# Altium PCB AmplificadorRF.PcbDoc
Units mm, origin at the board's own origin, x right, y up, seen from the top; angles counter-clockwise.
Board outline 199.01 x 104.14 mm, 2 copper layers (Top Layer, Bottom Layer); 57 components, 27 nets, 132 pads, 0 vias.
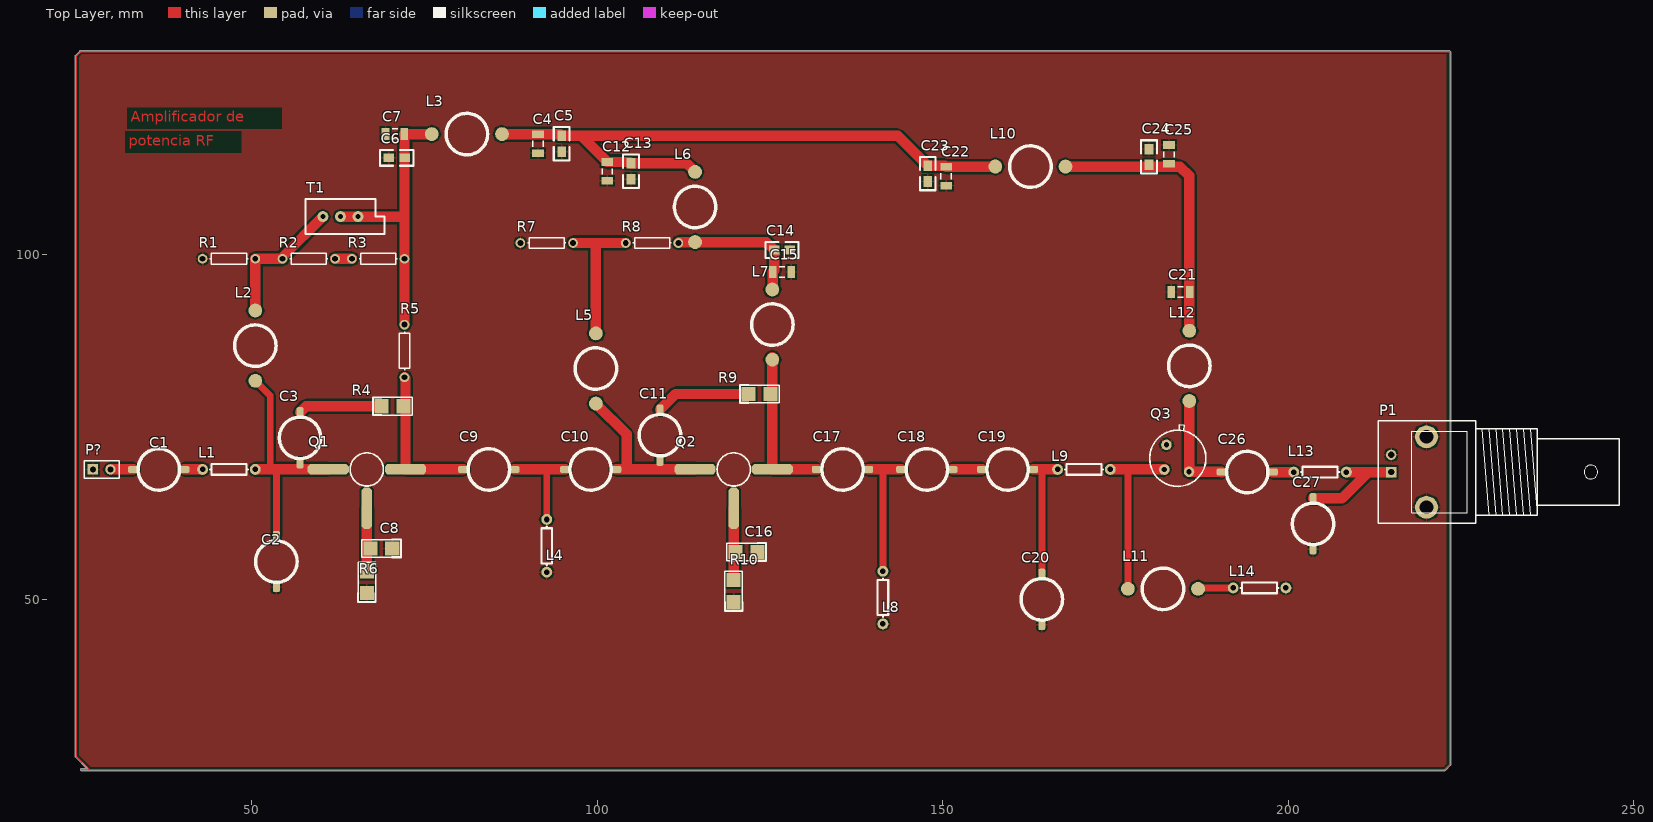
[diagram p0: Top Layer view]
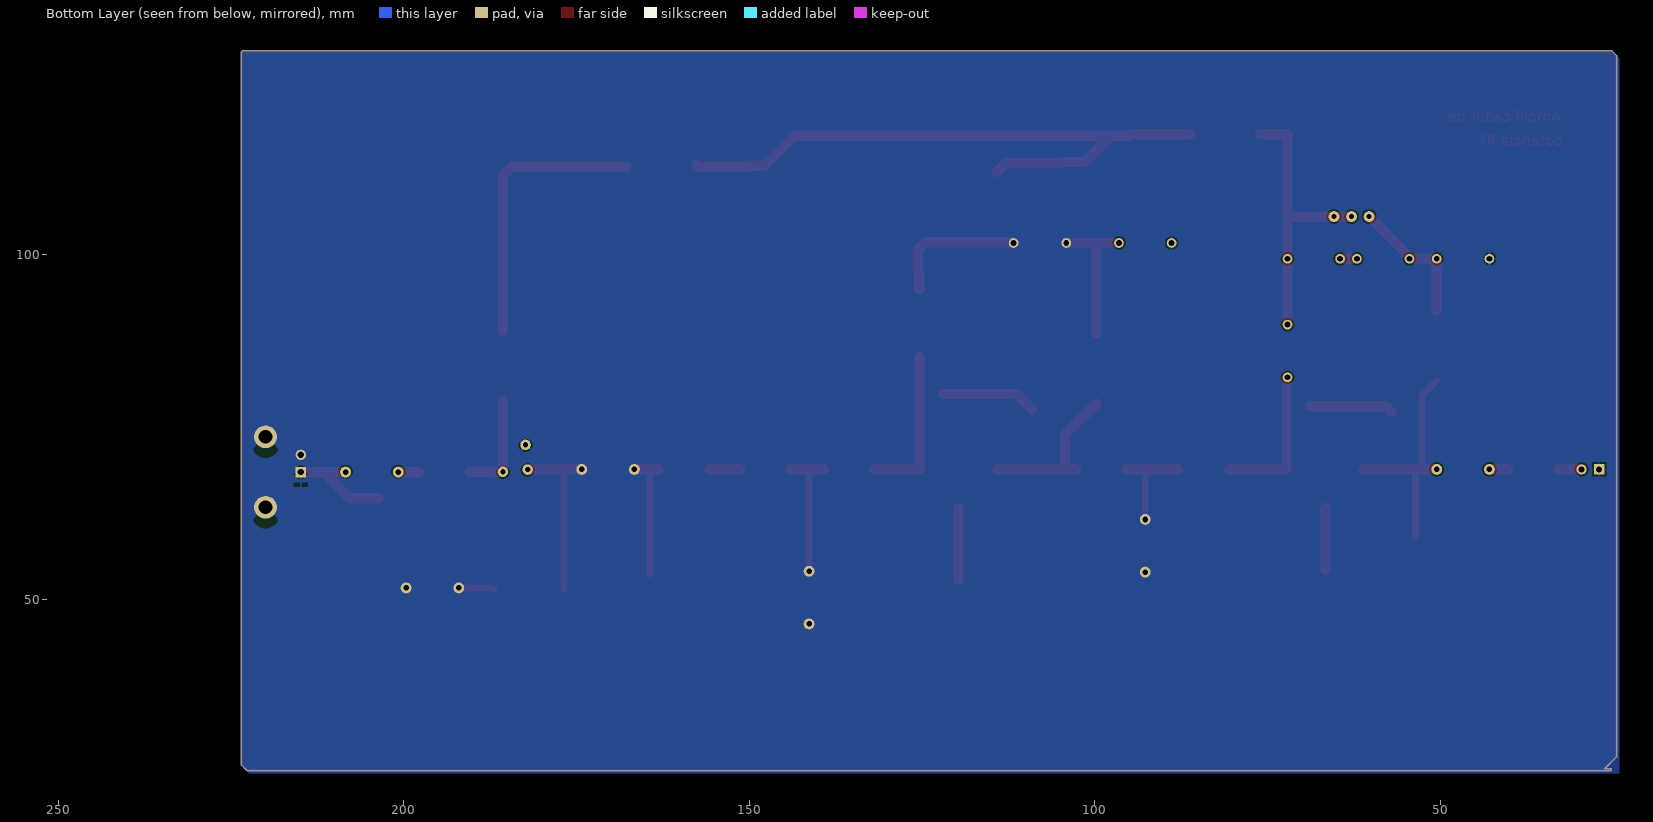
[diagram p1: Bottom Layer view, seen from below]

## Layer stack, top to bottom
Top Solder: solder mask 0.0102, Solder Resist, Dk 3.5
Top Layer: signal copper 0.0356
Dielectric 1: dielectric 0.32, FR-4, Dk 4.8
Bottom Layer: signal copper 0.0356
Bottom Solder: solder mask 0.0102, Solder Resist, Dk 3.5

## Board outline
24.548,27.214 cw(c24.638,27.305) 24.511,27.305 24.511,128.651 cw(c24.638,128.651) 24.548,128.742 24.548,128.741 25.183,129.376 25.182,129.376 cw(c25.273,129.286) 25.273,129.413 223.266,129.413 cw(c223.266,129.286) 223.357,129.376 223.356,129.376 223.483,129.249 223.483,129.25 cw(c223.393,129.159) 223.52,129.159 223.52,26.162 cw(c223.393,26.162) 223.483,26.071 223.483,26.072 222.721,25.31 222.722,25.31 cw(c222.631,25.4) 222.631,25.273 25.4,25.273 cw(c25.4,25.4) 25.4,25.527 26.235,25.527

## Design rules (kind name [scope] priority, off if disabled: settings)
Clearance [All] p1: gap=0.254
PolygonConnect [All] p1: connectstyle=Relief reliefconductorwidth=0.254 reliefentries=4 polygonreliefangle="90 Angle" airgapwidth=0.254
RoomDefinition AmplificadorRF [InComponentClass('AmplificadorRF')] p1: confinementstyle=ConfineIn formatcopy=TRUE lockcomponents=FALSE outline 243.967,37.973 302.133,37.973 302.133,60.198 243.967,60.198
RoutingVias [All] p1: holewidth=0.711 width=1.27 viastyle="Through Hole" minholewidth=0.711 minwidth=1.27 maxholewidth=0.711 maxwidth=1.27
SolderMaskExpansion [All] p1: expansion=0.102
Width [All] p1: maxlimit=2 minlimit=0.254 preferedwidth=0.254
30 further rules are at their usual default settings.

## Components (designator, comment, footprint, x,y, rotation, side; value= is the part's Value field where it differs from the comment)
C1 "Cap Var" Trimer 36.576,68.834 r270 top
C2 "Cap Var" Trimer 53.594,55.499 r0 top
C3 "Cap Var" Trimer 57.023,73.406 r0 top
C4 "Cap Semi" C1206#1 91.44,115.951 r270 top
C5 "Cap Semi" 0805 94.869,117.094 r270 top
C6 "Cap Semi" 0805 72.136,113.919 r180 top
C7 "Cap Semi" C1206#1 70.739,117.348 r180 top
C8 "Cap Semi" C1206#2 70.358,57.404 r180 top
C9 "Cap Var" Trimer 84.328,68.834 r90 top
C10 "Cap Var" Trimer 99.06,68.834 r90 top
C11 "Cap Var" Trimer 109.093,73.787 r0 top
C12 "Cap Semi" C1206#1 101.473,111.967 r270 top
C13 "Cap Semi" 0805 104.902,113.11 r270 top
C14 "Cap Semi" 0805 125.603,100.584 r0 top
C15 "Cap Semi" C1206#1 126.746,97.409 r0 top
C16 "Cap Semi" C1206#2 123.19,56.896 r180 top
C17 "Cap Var" Trimer 135.509,68.834 r90 top
C18 "Cap Var" Trimer 147.701,68.834 r90 top
C19 "Cap Var" Trimer 159.385,68.834 r90 top
C20 "Cap Var" Trimer 164.338,50.038 r180 top
C21 "Cap Semi" C1206#1 184.404,94.488 r0 top
C22 "Cap Semi" C1206#1 150.495,111.252 r270 top
C23 "Cap Semi" 0805 147.828,112.776 r270 top
C24 "Cap Semi" 0805 179.832,112.903 r90 top
C25 "Cap Semi" C1206#1 182.753,114.427 r90 top
C26 "Cap Var" Trimer 194.056,68.453 r90 top
C27 "Cap Var" Trimer 203.581,60.96 r180 top
L1 "Inductor" AXIAL0.3 42.926,68.834 r0 top
L2 "Inductor Iron" VK200 50.546,86.741 r180 top
L3 "Inductor Iron" VK200 81.153,117.348 r90 top
L4 "Inductor" AXIAL0.3 92.71,53.975 r90 top
L5 "Inductor Iron" VK200 99.822,83.439 r180 top
L6 "Inductor Iron" VK200 114.173,106.807 r180 top
L7 "Inductor Iron" VK200 125.349,89.789 r180 top
L8 "Inductor" AXIAL0.3 141.351,46.482 r90 top
L9 "Inductor" AXIAL0.3 166.624,68.834 r0 top
L10 "Inductor Iron" VK200 162.687,112.649 r270 top
L11 "Inductor Iron" VK200 181.864,51.562 r270 top
L12 "Inductor Iron" VK200 185.674,83.82 r180 top
L13 "Inductor" AXIAL0.3 200.787,68.453 r0 top
L14 "Inductor" AXIAL0.3 192.024,51.689 r0 top
P1 "BNC" "BNC_RA CON" 214.884,68.453 r180 top
P? "Header 2" HDR1X2 27.051,68.834 r0 top
Q1 "2N3904" TO50 66.675,68.834 r90 top
Q2 "2N3904" TO50 119.761,68.834 r90 top
Q3 "2N3904" TO-39 182.372,72.39 r130 top
R1 "Res1" AXIAL-0.3 46.736,99.314 r0 top
R2 "Res1" AXIAL-0.3 58.293,99.314 r0 top
R3 "Res1" AXIAL-0.3 68.326,99.314 r0 top
R4 "Res1" C1206#2 68.834,77.978 r0 top
R5 "Res1" AXIAL-0.3 72.136,85.979 r90 top
R6 "Res3" C1206#2 66.675,50.927 r90 top
R7 "Res1" AXIAL-0.3 92.71,101.6 r0 top
R8 "Res1" AXIAL-0.3 107.95,101.6 r0 top
R9 "Res1" C1206#2 121.92,79.756 r0 top
R10 "Res3" C1206#2 119.761,49.657 r90 top
T1 "Contraste" VR5 60.325,105.41 r0 top

## Footprints (in the part's own frame and the unit in brackets; to place one, negate y for a bottom-side part, rotate by r counter-clockwise, add the part's x,y. Pads: shape width x height; smd on the part's side, far side on the other; paste and mask are expansions set on the pad)
0805 [mil]
  rect 60x50 smd: 1(0,0) 2(90,0)
  silkscreen extent -50,-45 140,45
AXIAL0.3 [mil]
  round 62 hole 32: 1(0,0) 2(300,0)
  silkscreen extent 41,-30 259,30
AXIAL-0.3 [mm] "Axial Device, Thru-Hole; 2 Leads; 0.3 in Pin Spacing"
  round 1.4 hole 0.85: 1(-3.81,0) 2(3.81,0)
  silkscreen extent -2.77,-0.76 2.77,0.76
"BNC_RA CON" [mm] "Connector; BNC Elbow"
  rect 1.5x1.5 hole 0.9: 1(0,0)
  round 3.3 hole 2: 2(-5.1,5.1) 2(-5.1,-5.1)
  round 1.5 hole 0.9: 2(0,-2.5)
  silkscreen extent -33,-7.4 1.9,7.4
C1206#1 [mm] "Chip Capacitor, Body 3.2x1.6mm, IPC High Density"
  rect 1.1x1.7 smd: 1(-1.35,0) 2(1.35,0)
  silkscreen extent -0.4,-0.75 0.4,0.75, body extent -1.7,-0.9 1.7,0.9, height 1.3
C1206#2 [mm]
  rect 2.032x2.032 smd paste-1.041: 1(0,0) 2(3.175,0)
  oct 1.981x1.981 on Top Paste: z(0,0) z(3.175,0)
  silkscreen extent -1.27,-1.27 4.44,1.27
HDR1X2 [mm] "Connector; Header; 2 Position"
  rect 1.5x1.5 hole 0.9: 1(0,0)
  round 1.5 hole 0.9: 2(2.54,0)
  silkscreen extent -1.27,-1.27 3.81,1.27
TO50 [mm]
  oct 6x1.5 smd: 1(-5.588,0)
  oct 1.5x6 smd: 2(0,5.6) 3(0,-5.6)
  silkscreen extent -2.4,-2.4 2.4,2.4
TO-39 [mil]
  round 60 hole 30: 1(0,0) 2(-100,100) 3(-200,0)
  silkscreen extent -260,-160 60,160
Trimer [mm]
  rrect50% 1x1.5 smd: 1(0,-3.683) 2(0,3.683)
  silkscreen extent -3,-3 3,3
VK200 [mm]
  round 2 smd: 1(0,5.08) 2(0,-5.08)
  silkscreen extent -3,-3 3,3
VR5 [mil]
  round 62 hole 28: 1(0,0) 2(100,0) 3(200,0)
  silkscreen extent -100,-100 350,100

## Part data
C1 C2 C3 C9 C10 C11 C17 C18 C19 C20 C26 C27: "Variable or Adjustable Capacitor"
C4 C5 C6 C7 C8 C12 C13 C14 C15 C16 C21 C22 C23 C24 C25: "Capacitor (Semiconductor SIM Model)"
L2 L3 L5 L6 L7 L10 L11 L12: "Magnetic-Core Inductor"
P1: "BNC Elbow Connector"
P?: "Header, 2-Pin"
Q1 Q2 Q3: "NPN General Purpose Amplifier"
R1 R2 R3 R4 R5 R6 R7 R8 R9 R10: "Resistor"
T1: library part "RESISTOR TAPPED", "TRIMPOT AJUSTE VERT"

## Nets (pads, with @x,y where several pads share a name; then routed paths per layer and width w, separated by ;. In a path a pad name is that pad's centre, name@x,y a point inside that pad or via, vN(x,y) a via of type N, cw(c..) or ccw(c..) an arc to the next point about the centre after c; other vN are vias at no path point)
GND: C2.1 C4.2 C5.2 C6.2 C7.2 C8.1 C12.2 C13.2 C14.2 C15.2 C16.1 C20.2 C21.1 C22.2 C23.2 C24.2 C25.2 C27.2 L4.1 L8.1 L14.2 P1.2 P?.1 Q3.1 R1.1 R6.1 R7.1 R10.1
NetC1_1: C1.1 P?.2 | length 3.3
  Top Layer w1.5: P?.2 C1.1
NetC1_2: C1.2 L1.1 | length 2.7
  Top Layer w1.5: C1.2 L1.1
NetC2_2: C2.2 C3.1 L1.2 L2.1 Q1.2 | length 34
  Top Layer w1: L2.1 52.705,79.502 52.705,68.834 ; C2.2 53.594,68.707
  Top Layer w1.5: L1.2 52.705,68.834 53.467,68.834 ; 53.594,68.707 53.467,68.834 ; Q1.2 53.467,68.834
NetC3_2: C3.2 R4.1 | length 12.2
  Top Layer w1.5: C3.2 57.912,77.978 R4.1
NetC6_1: C6.1 C7.1 L3.1 R3.2 R5.2 T1.2 T1.3 | length 40.8
  Top Layer w1.5: T1.2 T1.3 72.136,105.41 ; R5.2 R3.2 72.136,105.41 ; L3.1 C7.1 72.136,117.301 C6.1 72.136,105.41
NetC8_2: C8.2 Q1.1 R6.2 | length 8.9
  Top Layer w1.5: R6.2@66.675,54.309 Q1.1
NetC9_1: C9.1 C10.2 L4.2 | length 14.6
  Top Layer w1: L4.2 92.71,68.834
  Top Layer w1.5: C9.1 92.71,68.834 C10.2
NetC9_2: C9.2 Q1.3 R4.2 R5.1 | length 21.8
  Top Layer w1.5: R5.1 72.275,82.03 72.275,77.978 Q1.3 C9.2
NetC10_1: C10.1 C11.1 L5.1 Q2.2 | length 22.8
  Top Layer w1.5: L5.1 104.267,73.914 104.267,68.834 ; C10.1 104.267,68.834 ; Q2.2 104.267,68.834
NetC11_2: C11.2 R9.1 | length 13.8
  Top Layer w1.5: C11.2 111.379,79.756 R9.1
NetC14_1: C14.1 C15.1 L6.1 L7.2 R8.2 | length 20.2
  Top Layer w1.5: R8.2 111.887,101.727 L6.1 124.46,101.727 C14.1 125.603,97.616 C15.1 125.396,94.916 L7.2
NetC16_2: C16.2 Q2.1 R10.2 | length 10.4
  Top Layer w1.5: R10.2 Q2.1
NetC17_1: C17.1 C18.2 L8.2 | length 19.6
  Top Layer w1: L8.2 141.351,68.707 141.478,68.834
  Top Layer w1.5: C17.1 141.478,68.834 C18.2
NetC17_2: C17.2 L7.1 Q2.3 R9.2 | length 22.7
  Top Layer w1.5: R9.2@125.349,80.391 R9.2@125.361,80.379 ; L7.1@125.349,85.09 125.361,85.078 R9.2@125.361,80.379 ; C17.2 Q2.3 125.361,79.629 R9.2@125.361,80.379
NetC18_1: C18.1 C19.2 | length 4.3
  Top Layer w1.5: C18.1 C19.2
NetC19_1: C19.1 C20.1 L9.1 | length 18.7
  Top Layer w1: C20.1 164.338,68.834
  Top Layer w1.5: C19.1 164.338,68.834 L9.1
NetC21_2: C21.2 C24.1 C25.1 L10.1 L12.2 | length 40.9
  Top Layer w1.5: L10.1 184.324,112.649 185.674,111.299 L12.2
NetC26_1: C26.1 L13.1 | length 3
  Top Layer w1.5: C26.1 L13.1
NetC26_2: C26.2 L12.1 Q3.3 | length 15
  Top Layer w1.5: L12.1 185.674,68.535 Q3.3 190.327,68.499 C26.2
NetC27_1: C27.1 L13.2 P1.1 | length 16.1
  Top Layer w1.5: C27.1 207.772,64.643 211.582,68.453 ; L13.2 211.582,68.453 ; P1.1 211.582,68.453
NetL2_2: L2.2 R1.2 R2.1 T1.1 | length 19.9
  Top Layer w1.5: L2.2 R1.2 R2.1 54.483,99.568 T1.1
NetL5_2: L5.2 R7.2 R8.1 | length 20.7
  Top Layer w1.5: R7.2 99.822,101.6 ; L5.2 99.822,101.6 ; R8.1 99.822,101.6
NetL9_2: L9.2 L11.2 Q3.2 | length 25.1
  Top Layer w1: L11.2 176.784,68.834
  Top Layer w1.5: L9.2 176.784,68.834 182.036,68.834 Q3.2
NetL11_1: L11.1 L14.1 | length 5.1
  Top Layer w1: L11.1 187.071,51.689 L14.1
NetR2_2: R2.2 R3.1 | length 2.4
  Top Layer w1.5: R2.2 R3.1
VCC: C4.1 C5.1 C12.1 C13.1 C22.1 C23.1 L3.2 L6.2 L10.2 | length 92.1
  Top Layer w1.5: L3.2 91.393,117.348 C4.1 94.662,117.301 C5.1 97.696,117.094 ; L6.2 112.95,113.11 C13.1 104.695,113.317 C12.1 97.696,117.094 ; L10.2@157.607,112.903 157.306,112.602 C22.1 150.321,112.776 C23.1 143.51,117.094 97.696,117.094
pads on no net: C8.z C16.z R4.z R6.z R9.z R10.z
copper on no net: | length 604.4
  Top Layer w0.254: 25.4,25.4 222.631,25.4 223.393,26.162 223.393,129.159 223.266,129.286 25.273,129.286 24.638,128.651 24.638,27.305 26.543,25.4

## Polygon pours and split planes (outlines as drawn)
GND on Bottom Layer "GND" (solid, pour order 8): 24.808,128.983 223.344,128.983 223.52,129.159 223.106,128.744 223.106,25.687 25.825,25.687 25.4,25.262 24.808,25.854 24.808,128.983
GND on Bottom Layer "GND" (solid, pour order 2): 24.548,128.741 24.966,129.159 223.52,129.159 223.52,26.102 223.106,25.687 222.311,24.892 24.13,24.892 24.13,128.304 25.224,129.398 25.239,129.413 25.273,129.413
GND on Top Layer "GND" (solid, pour order 14): 24.511,25.4 24.511,128.712 24.862,129.062 222.407,129.062 222.631,129.286 222.885,129.032 222.885,25.654 24.765,25.654 24.511,25.4

## Other copper
Top Layer:
  rectangle net NetC17_2: 125.349,80.379 125.361,85.09
  text "Amplificador de" at 32.512,119.126 h1.52
  text "potencia RF" at 32.258,115.697 h1.52